# EAGLE board schematic-1 (EAGLE 7.2.0)

Size 160 x 100 mm. Coordinates in mm from the lower left corner, seen from the top.
Outline: 0,0 160,0 160,100 0,100 0,0
Copper layers (1*16): Top 0.035mm / dielectric 1.5mm / Bottom 0.035mm
Design rules "default": minimum track width 10mil, minimum drill 24mil, track to track 8mil, track to pad 8mil, pad to pad 8mil, via to via 8mil, smd to smd 8mil, copper to edge 40mil, drill to drill 8mil, minimum pad ring 10mil, minimum via ring 8mil, stop-mask expansion 4mil, vias tented up to drill 0mil, thermal gap 10mil

## Footprints (pad centres in the part's own frame; a part is rotated, then mirrored left to right if it is on the bottom)
PANASONIC_D = smd 3 x 1.4: + 2.4,0; - -2.4,0
C0805K = smd 1.3 x 1.6: 1 -1,0; 2 1,0
USB-MINIB = smd 0.5 x 2.308: D+ 0,4.064; D- -0.8,4.064; GND 1.6,4.064; ID 0.8,4.064; VBUS -1.6,4.064 | smd 2 x 2.4: GND1 -4.4,-2; GND2 -4.4,3.5; GND3 4.4,3.5; GND4 4.4,-2 | hole 1: -2.2,1; 2.2,1
DO-214AC = smd 1.8 x 2.4: A 2.025,0; C -2.025,0
LQFP100-14MM = smd 0.3 x 1.2: P$1 -6,-7.75; P$2 -5.5,-7.75; P$3 -5,-7.75; P$4 -4.5,-7.75; P$5 -4,-7.75; P$6 -3.5,-7.75; P$7 -3,-7.75; P$8 -2.5,-7.75; P$9 -2,-7.75; P$10 -1.5,-7.75; P$11 -1,-7.75; P$12 -0.5,-7.75; P$13 0,-7.75; P$14 0.5,-7.75; P$15 1,-7.75; P$16 1.5,-7.75; P$17 2,-7.75; P$18 2.5,-7.75; P$19 3,-7.75; P$20 3.5,-7.75; P$21 4,-7.75; P$22 4.5,-7.75; P$23 5,-7.75; P$24 5.5,-7.75; P$25 6,-7.75; P$51 6,7.75; P$52 5.5,7.75; P$53 5,7.75; P$54 4.5,7.75; P$55 4,7.75; P$56 3.5,7.75; P$57 3,7.75; P$58 2.5,7.75; P$59 2,7.75; P$60 1.5,7.75; P$61 1,7.75; P$62 0.5,7.75; P$63 0,7.75; P$64 -0.5,7.75; P$65 -1,7.75; P$66 -1.5,7.75; P$67 -2,7.75; P$68 -2.5,7.75; P$69 -3,7.75; P$70 -3.5,7.75; P$71 -4,7.75; P$72 -4.5,7.75; P$73 -5,7.75; P$74 -5.5,7.75; P$75 -6,7.75 | smd 1.2 x 0.3: P$26 7.75,-6; P$27 7.75,-5.5; P$28 7.75,-5; P$29 7.75,-4.5; P$30 7.75,-4; P$31 7.75,-3.5; P$32 7.75,-3; P$33 7.75,-2.5; P$34 7.75,-2; P$35 7.75,-1.5; P$36 7.75,-1; P$37 7.75,-0.5; P$38 7.75,0; P$39 7.75,0.5; P$40 7.75,1; P$41 7.75,1.5; P$42 7.75,2; P$43 7.75,2.5; P$44 7.75,3; P$45 7.75,3.5; P$46 7.75,4; P$47 7.75,4.5; P$48 7.75,5; P$49 7.75,5.5; P$50 7.75,6; P$76 -7.75,6; P$77 -7.75,5.5; P$78 -7.75,5; P$79 -7.75,4.5; P$80 -7.75,4; P$81 -7.75,3.5; P$82 -7.75,3; P$83 -7.75,2.5; P$84 -7.75,2; P$85 -7.75,1.5; P$86 -7.75,1; P$87 -7.75,0.5; P$88 -7.75,0; P$89 -7.75,-0.5; P$90 -7.75,-1; P$91 -7.75,-1.5; P$92 -7.75,-2; P$93 -7.75,-2.5; P$94 -7.75,-3; P$95 -7.75,-3.5; P$96 -7.75,-4; P$97 -7.75,-4.5; P$98 -7.75,-5; P$99 -7.75,-5.5; P$100 -7.75,-6
SOIC8 = smd 0.6 x 2.2: 1 -1.905,-2.6; 2 -0.635,-2.6; 3 0.635,-2.6; 4 1.905,-2.6; 5 1.905,2.6; 6 0.635,2.6; 7 -0.635,2.6; 8 -1.905,2.6
TO263-5 = smd 1.067 x 2.159: 1 -3.404,-5.791; 2 -1.702,-5.791; 3 0,-5.791; 4 1.702,-5.791; 5 3.404,-5.791 | smd 10.8 x 10.41: 6 0,2.54
2X03 = drill 1.016 octagon: 1 -2.54,-1.27; 2 -2.54,1.27; 3 0,-1.27; 4 0,1.27; 5 2.54,-1.27; 6 2.54,1.27
1X04 = drill 1.016 long: 1 -3.81,0; 2 -1.27,0; 3 1.27,0; 4 3.81,0
2X05 = drill 1.016 octagon: 1 -5.08,-1.27; 2 -5.08,1.27; 3 -2.54,-1.27; 4 -2.54,1.27; 5 0,-1.27; 6 0,1.27; 7 2.54,-1.27; 8 2.54,1.27; 9 5.08,-1.27; 10 5.08,1.27
1X03 = drill 1.016 long: 1 -2.54,0; 2 0,0; 3 2.54,0
1X06 = drill 1.016 long: 1 -6.35,0; 2 -3.81,0; 3 -1.27,0; 4 1.27,0; 5 3.81,0; 6 6.35,0
PINHEAD-4PIN = drill 0.9 pad 1.93: 1 -3.8,0; 2 -1.26,0; 3 1.28,0; 4 3.82,0
PINHEAD-2PIN-HP = drill 1.1 pad 3.5: 1 -2.54,0; 2 2.54,0
0805 = smd 0.8 x 1.2: 1 -0.9,0; 2 0.9,0
CHIP-LED0805 = smd 1.2 x 1.2: A 0,-1.05; C 0,1.05
SOT23 = smd 1 x 1.4: 1 -0.95,-1.1; 2 0.95,-1.1; 3 0,1.1
R0805 = smd 1.3 x 1.5: 1 -0.95,0; 2 0.95,0
TACTILE-PTH = drill 1.016 pad 1.88: 1 -3.251,2.261; 2 3.251,2.261; 3 -3.251,-2.261; 4 3.251,-2.261
SOT669 = smd 0.5 x 1.6: 1 -1.905,-2.8; 2 -0.635,-2.8; 3 0.635,-2.8; 4 1.905,-2.8 | smd 5.2 x 2.7: MB 0,3.3
A4988BREAKOUT = drill 0.9: 1A 8.89,1.27; 1B 11.43,1.27; 2A 6.35,1.27; 2B 3.81,1.27; DIR 16.51,-11.43; EN -1.27,-11.43; GND 16.51,1.27; GND@0 1.27,1.27; MS1 1.27,-11.43; MS2 3.81,-11.43; MS3 6.35,-11.43; RST 8.89,-11.43; SLP 11.43,-11.43; STEP 13.97,-11.43; VDD 13.97,1.27; VMOT -1.27,1.27

## Placement (x,y rotation side)
C1  100uF  [PANASONIC_D]  -81.28,64.77 0 top  (outside the outline)
C2  100uF  [PANASONIC_D]  -90.17,64.77 0 top  (outside the outline)
C3  100uF  [PANASONIC_D]  -99.06,64.77 0 top  (outside the outline)
C4  100uF  [PANASONIC_D]  -17.78,72.39 0 top  (outside the outline)
C5  100uF  [PANASONIC_D]  -26.67,72.39 0 top  (outside the outline)
C6  100uF  [PANASONIC_D]  -35.56,72.39 0 top  (outside the outline)
C9  100nF  [C0805K]  -44.45,104.14 0 top  (outside the outline)
C10  100nF  [C0805K]  -50.8,104.14 0 top  (outside the outline)
C11  4.7uF  [C0805K]  -21.59,110.49 0 top  (outside the outline)
C12  100nF  [C0805K]  -57.15,104.14 0 top  (outside the outline)
C13  100nF  [C0805K]  -63.5,104.14 0 top  (outside the outline)
C14  100nF  [C0805K]  -69.85,104.14 0 top  (outside the outline)
C15  10nF  [C0805K]  -26.67,110.49 0 top  (outside the outline)
C16  1uF  [C0805K]  -62.23,110.49 0 top  (outside the outline)
C17  10uF  [C0805K]  -31.75,110.49 0 top  (outside the outline)
C18  10uF  [C0805K]  -36.83,110.49 0 top  (outside the outline)
C19  10uF  [C0805K]  -41.91,110.49 0 top  (outside the outline)
C20  10uF  [C0805K]  -46.99,110.49 0 top  (outside the outline)
C21  10uF  [C0805K]  -52.07,110.49 0 top  (outside the outline)
C22  100nF  [C0805K]  -76.2,104.14 0 top  (outside the outline)
C23  100nF  [C0805K]  -82.55,104.14 0 top  (outside the outline)
C24  100nF  [C0805K]  -88.9,104.14 0 top  (outside the outline)
C25  100nF  [C0805K]  -95.25,104.14 0 top  (outside the outline)
C26  100nF  [C0805K]  -101.6,104.14 0 top  (outside the outline)
C27  100nF  [C0805K]  -107.95,104.14 0 top  (outside the outline)
C28  100nF  [C0805K]  -16.51,110.49 0 top  (outside the outline)
C29  10nF  [C0805K]  -57.15,110.49 0 top  (outside the outline)
C30  100uF  [PANASONIC_D]  -44.45,72.39 0 top  (outside the outline)
C31  100uF  [PANASONIC_D]  -53.34,72.39 0 top  (outside the outline)
C32  100uF  [PANASONIC_D]  -106,-4 0 top  (outside the outline)
C33  100nF  [C0805K]  -109,-10 0 top  (outside the outline)
CN1  [USB-MINIB]  -100.33,22.86 0 top  (outside the outline)
D1  1N400x-SMD  [DO-214AC]  -102.87,48.26 0 top  (outside the outline)
D2  1N400x-SMD  [DO-214AC]  -22.86,57.15 0 top  (outside the outline)
D3  1N400x-SMD  [DO-214AC]  -35.56,57.15 0 top  (outside the outline)
D4  1N400x-SMD  [DO-214AC]  -48.26,57.15 0 top  (outside the outline)
D5  1N400x-SMD  [DO-214AC]  -60.96,57.15 0 top  (outside the outline)
D6  1N400x-SMD  [DO-214AC]  -73.66,57.15 0 top  (outside the outline)
D7  1N400x-SMD  [DO-214AC]  -86.36,57.15 0 top  (outside the outline)
D8  1N5820  [DO-214AC]  -99.06,57.15 0 top  (outside the outline)
IC1  STM32F10XV  [LQFP100-14MM]  -21.59,8.89 0 top  (outside the outline)
IC2  LT1763CS8-3.3  [SOIC8]  -35.56,3.81 0 top  (outside the outline)
IC3  [TO263-5]  -45.72,7.62 0 top  (outside the outline)
JP1  [2X03]  -44.45,46.99 0 top  (outside the outline)
JP2  [1X04]  -81.28,91.44 0 top  (outside the outline)
JP3  [1X04]  -92.71,91.44 0 top  (outside the outline)
JP4  [2X03]  -53.34,46.99 0 top  (outside the outline)
JP5  [1X04]  -104.14,91.44 0 top  (outside the outline)
JP6  [2X03]  -62.23,46.99 0 top  (outside the outline)
JP7  [1X04]  -19.05,97.79 0 top  (outside the outline)
JP8  [2X03]  -71.12,46.99 0 top  (outside the outline)
JP9  [1X04]  -30.48,97.79 0 top  (outside the outline)
JP10  [2X03]  -80.01,46.99 0 top  (outside the outline)
JP11  [1X04]  -41.91,97.79 0 top  (outside the outline)
JP12  [2X03]  -88.9,46.99 0 top  (outside the outline)
JP13  [2X05]  -33.02,46.99 0 top  (outside the outline)
JP14  [1X03]  -63.5,97.79 0 top  (outside the outline)
JP15  [1X03]  -72.39,97.79 0 top  (outside the outline)
JP16  [1X03]  -81.28,97.79 0 top  (outside the outline)
JP17  [1X03]  -90.17,97.79 0 top  (outside the outline)
JP18  [1X03]  -99.06,97.79 0 top  (outside the outline)
JP19  [1X03]  -17.78,104.14 0 top  (outside the outline)
JP20  [1X03]  -26.67,104.14 0 top  (outside the outline)
JP21  [1X03]  -35.56,104.14 0 top  (outside the outline)
JP22  [1X04]  -53.34,97.79 0 top  (outside the outline)
JP23  [1X04]  -105,-28 0 top  (outside the outline)
JP24  [1X06]  -102,-22 0 top  (outside the outline)
JP25  [1X06]  -102,-34 0 top  (outside the outline)
JP26  [1X03]  -106,-40 0 top  (outside the outline)
JP27  [1X03]  -161,-46 0 top  (outside the outline)
JP28  [1X03]  -161,-52 0 top  (outside the outline)
JP29  [1X03]  -161,-58 0 top  (outside the outline)
JP30  [1X03]  -161,-64 0 top  (outside the outline)
JS1  PINHEAD-4PIN  [PINHEAD-4PIN]  -63.5,72.39 0 top  (outside the outline)
JS2  PINHEAD-4PIN  [PINHEAD-4PIN]  -74.93,72.39 0 top  (outside the outline)
JS3  PINHEAD-4PIN  [PINHEAD-4PIN]  -86.36,72.39 0 top  (outside the outline)
JS4  PINHEAD-4PIN  [PINHEAD-4PIN]  -97.79,72.39 0 top  (outside the outline)
JS5  PINHEAD-4PIN  [PINHEAD-4PIN]  -19.05,80.01 0 top  (outside the outline)
JS6  PINHEAD-4PIN  [PINHEAD-4PIN]  -30.48,80.01 0 top  (outside the outline)
JS7  PINHEAD-2PIN-HP  [PINHEAD-2PIN-HP]  -19.05,39.37 0 top  (outside the outline)
JS8  PINHEAD-2PIN-HP  [PINHEAD-2PIN-HP]  -117,-35 0 top  (outside the outline)
JS9  PINHEAD-2PIN-HP  [PINHEAD-2PIN-HP]  -128,-35 0 top  (outside the outline)
JS10  PINHEAD-2PIN-HP  [PINHEAD-2PIN-HP]  -139,-35 0 top  (outside the outline)
JS11  PINHEAD-2PIN-HP  [PINHEAD-2PIN-HP]  -150,-35 0 top  (outside the outline)
JS12  PINHEAD-2PIN-HP  [PINHEAD-2PIN-HP]  -161,-35 0 top  (outside the outline)
L1  10uH  [0805]  -66.04,110.49 0 top  (outside the outline)
L2  100uH  [0805]  -69.85,110.49 0 top  (outside the outline)
LED1  WHITE  [CHIP-LED0805]  -82.55,36.83 0 top  (outside the outline)
LED2  WHITE  [CHIP-LED0805]  -88.9,36.83 0 top  (outside the outline)
LED3  WHITE  [CHIP-LED0805]  -95.25,36.83 0 top  (outside the outline)
LED4  WHITE  [CHIP-LED0805]  -101.6,36.83 0 top  (outside the outline)
LED5  WHITE  [CHIP-LED0805]  -107.95,36.83 0 top  (outside the outline)
LED6  WHITE  [CHIP-LED0805]  -16.51,46.99 0 top  (outside the outline)
LED7  RED  [CHIP-LED0805]  -60.96,64.77 0 top  (outside the outline)
LED8  RED  [CHIP-LED0805]  -67.31,64.77 0 top  (outside the outline)
LED9  RED  [CHIP-LED0805]  -73.66,64.77 0 top  (outside the outline)
LED10  RED  [CHIP-LED0805]  -22.86,46.99 0 top  (outside the outline)
Q1  BSH105  [SOT23]  -107.95,57.15 0 top  (outside the outline)
Q2  BSH105  [SOT23]  -19.05,64.77 0 top  (outside the outline)
Q3  BSH105  [SOT23]  -27.94,64.77 0 top  (outside the outline)
Q4  BSH105  [SOT23]  -36.83,64.77 0 top  (outside the outline)
Q5  BSH105  [SOT23]  -45.72,64.77 0 top  (outside the outline)
Q6  BSH105  [SOT23]  -54.61,64.77 0 top  (outside the outline)
R1  4k7  [R0805]  -53.34,92.71 0 top  (outside the outline)
R2  4k7  [R0805]  -58.42,92.71 0 top  (outside the outline)
R3  4k7  [R0805]  -63.5,92.71 0 top  (outside the outline)
R4  4k7  [R0805]  -68.58,92.71 0 top  (outside the outline)
R5  4k7  [R0805]  -73.66,92.71 0 top  (outside the outline)
R6  100k  [R0805]  -97.79,78.74 0 top  (outside the outline)
R7  100k  [R0805]  -104.14,78.74 0 top  (outside the outline)
R8  10R  [R0805]  -80.01,86.36 0 top  (outside the outline)
R9  180R  [R0805]  -40.64,78.74 0 top  (outside the outline)
R10  100k  [R0805]  -16.51,86.36 0 top  (outside the outline)
R11  100k  [R0805]  -22.86,86.36 0 top  (outside the outline)
R12  10R  [R0805]  -86.36,86.36 0 top  (outside the outline)
R13  180R  [R0805]  -46.99,78.74 0 top  (outside the outline)
R14  100k  [R0805]  -29.21,86.36 0 top  (outside the outline)
R15  100k  [R0805]  -35.56,86.36 0 top  (outside the outline)
R16  10R  [R0805]  -92.71,86.36 0 top  (outside the outline)
R17  180R  [R0805]  -53.34,78.74 0 top  (outside the outline)
R18  100k  [R0805]  -41.91,86.36 0 top  (outside the outline)
R19  100k  [R0805]  -48.26,86.36 0 top  (outside the outline)
R20  10R  [R0805]  -99.06,86.36 0 top  (outside the outline)
R21  180R  [R0805]  -59.69,78.74 0 top  (outside the outline)
R22  100k  [R0805]  -54.61,86.36 0 top  (outside the outline)
R23  100k  [R0805]  -60.96,86.36 0 top  (outside the outline)
R24  10R  [R0805]  -105.41,86.36 0 top  (outside the outline)
R25  180R  [R0805]  -66.04,78.74 0 top  (outside the outline)
R26  100k  [R0805]  -67.31,86.36 0 top  (outside the outline)
R27  100k  [R0805]  -73.66,86.36 0 top  (outside the outline)
R28  10R  [R0805]  -16.51,92.71 0 top  (outside the outline)
R29  180R  [R0805]  -72.39,78.74 0 top  (outside the outline)
R30  22R  [R0805]  -22.86,92.71 0 top  (outside the outline)
R31  22R  [R0805]  -29.21,92.71 0 top  (outside the outline)
R32  1k  [R0805]  -35.56,92.71 0 top  (outside the outline)
R33  180R  [R0805]  -78.74,78.74 0 top  (outside the outline)
R34  180R  [R0805]  -85.09,78.74 0 top  (outside the outline)
R35  100R  [R0805]  -91.44,78.74 0 top  (outside the outline)
R36  10K  [R0805]  -41.91,92.71 0 top  (outside the outline)
R37  3K3  [R0805]  -48.26,92.71 0 top  (outside the outline)
S2  SWITCH-MOMENTARY-2PTH  [TACTILE-PTH]  -36.83,36.83 0 top  (outside the outline)
T1  PSMN7R0-30YL  [SOT669]  -44.45,36.83 0 top  (outside the outline)
T2  PSMN7R0-30YL  [SOT669]  -50.8,36.83 0 top  (outside the outline)
T3  PSMN7R0-30YL  [SOT669]  -57.15,36.83 0 top  (outside the outline)
T4  PSMN7R0-30YL  [SOT669]  -63.5,36.83 0 top  (outside the outline)
T5  PSMN7R0-30YL  [SOT669]  -69.85,36.83 0 top  (outside the outline)
T6  PSMN7R0-30YL  [SOT669]  -76.2,36.83 0 top  (outside the outline)
U$1  POLOLU_A4983CARRIER  [A4988BREAKOUT]  -71.12,12.7 0 top  (outside the outline)
U$2  POLOLU_A4983CARRIER  [A4988BREAKOUT]  -91.44,12.7 0 top  (outside the outline)
U$3  POLOLU_A4983CARRIER  [A4988BREAKOUT]  -30.48,30.48 0 top  (outside the outline)
U$4  POLOLU_A4983CARRIER  [A4988BREAKOUT]  -50.8,30.48 0 top  (outside the outline)
U$5  POLOLU_A4983CARRIER  [A4988BREAKOUT]  -71.12,30.48 0 top  (outside the outline)
U$6  POLOLU_A4983CARRIER  [A4988BREAKOUT]  -91.44,30.48 0 top  (outside the outline)

## Library data of the parts
C1-C6 C30-C32 = SparkFun-Capacitors
C9-C29 C33 R1-R37 = rcl
CN1 LED1-LED10 Q1-Q6 = adafruit
D1-D8 = diode
IC1 = STM32
IC2 = linear-technology; MPN: LT1763CS8-3.3; OC_FARNELL: 1273617; OC_NEWARK: 57M6055
IC3 = linear
JP1-JP30 = pinhead
JS1-JS12 T1-T6 = STamps
L1 L2 = SparkFun-Passives
S2 = SparkFun-Electromechanical; PROD_ID: SWCH-08441
U$1-U$6 = RepRapjr

## Nets
3.3V: C9.1 C10.1 C11.1 C12.1 C13.1 C14.1 C30.+ IC1.P$11 IC1.P$28 IC1.P$50 IC1.P$75 IC1.P$100 IC2.1 JP14.1 JP15.1 JP16.1 JP17.1 JP18.1 JP19.1 JP20.1 JP21.1 JP23.4 JP24.6 JP26.1 L1.1 R1.2 R2.2 R3.2 R4.2 R5.2 R6.2 R10.2 R14.2 R18.2 R22.2 R26.2 R35.1 U$1.VDD U$2.VDD U$3.VDD U$4.VDD U$5.VDD U$6.VDD
5V: C32.+ D7.C IC2.5 IC2.8 JP1.2 JP1.4 JP1.6 JP4.2 JP4.4 JP4.6 JP6.2 JP6.4 JP6.6 JP8.2 JP8.4 JP8.6 JP10.2 JP10.4 JP10.6 JP12.2 JP12.4 JP12.6 JP26.3 L2.2 R7.2 R9.1 R11.2 R13.1 R15.2 R17.1 R19.2 R21.1 R23.2 R25.1 R27.2 R29.1 R34.1 R36.2
12V: C1.+ C2.+ C3.+ C4.+ C5.+ C6.+ C31.+ C33.1 D1.C D2.C D3.C D4.C D5.C D6.C IC3.1 JS7.1 JS8.1 JS9.1 JS10.1 JS11.1 JS12.1 R32.1 U$1.VMOT U$2.VMOT U$3.VMOT U$4.VMOT U$5.VMOT U$6.VMOT
BED_LED: LED1.C R8.2 T1.4
BL_RX: IC1.P$79 JP25.3
BL_TX: IC1.P$78 JP25.2
BOOT0: IC1.P$94 JP15.2
BOOT1: IC1.P$37 JP21.2
E0: IC1.P$25 Q2.1 R10.1
E0_DIR: IC1.P$56 U$3.DIR
E0_EN: IC1.P$46 U$3.EN
E0_LED: LED2.C R12.2 T2.4
E0_OUTPUT: D1.A JS8.2 T2.MB
E0_STEP: IC1.P$55 U$3.STEP
E1: IC1.P$35 Q3.1 R14.1
E1_DIR: IC1.P$45 U$1.DIR
E1_EN: IC1.P$43 U$1.EN
E1_LED: LED3.C R16.2 T3.4
E1_OUTPUT: D3.A JS9.2 T3.MB
E1_STEP: IC1.P$44 U$1.STEP
E2: IC1.P$36 Q4.1 R18.1
E2_DIR: IC1.P$42 U$2.DIR
E2_EN: IC1.P$40 U$2.EN
E2_LED: LED4.C R20.2 T4.4
E2_OUTPUT: D4.A JS10.2 T4.MB
E2_STEP: IC1.P$41 U$2.STEP
EXTRA0: IC1.P$63 Q5.1 R22.1
EXTRA0_LED: LED5.C R24.2 T5.4
EXTRA0_OUTPUT: D5.A JS11.2 T5.MB
EXTRA1: IC1.P$64 Q6.1 R26.1
EXTRA1_LED: LED6.C R28.2 T6.4
EXTRA1_OUTPUT: D6.A JS12.2 T6.MB
GND: C1.- C2.- C3.- C4.- C5.- C6.- C9.2 C10.2 C11.2 C12.2 C13.2 C14.2 C15.1 C16.1 C17.2 C18.2 C19.2 C20.2 C21.2 C22.1 C23.1 C24.1 C25.1 C26.1 C27.1 C28.1 C30.- C31.- C32.- C33.2 CN1.GND D8.A IC1.P$10 IC1.P$19 IC1.P$20 IC1.P$27 IC1.P$49 IC1.P$74 IC1.P$99 IC2.3 IC2.6 IC2.7 IC3.3 IC3.5 IC3.6 JP13.2 JP13.4 JP13.6 JP13.8 JP13.10 JP14.2 JP15.3 JP16.2 JP17.2 JP18.2 JP19.2 JP20.2 JP21.3 JP23.1 JP24.4 JP25.4 JP27.1 JP28.1 JP29.1 JP30.1 LED7.C LED8.C LED9.C LED10.C Q1.2 Q2.2 Q3.2 Q4.2 Q5.2 Q6.2 R37.1 S2.3 T1.1 T1.2 T1.3 T2.1 T2.2 T2.3 T3.1 T3.2 T3.3 T4.1 T4.2 T4.3 T5.1 T5.2 T5.3 T6.1 T6.2 T6.3 U$1.GND U$1.GND@0 U$2.GND U$2.GND@0 U$3.GND U$3.GND@0 U$4.GND U$4.GND@0 U$5.GND U$5.GND@0 U$6.GND U$6.GND@0
HEATBED: IC1.P$24 Q1.1 R6.1
HEATBED_OUTPUT: D2.A JS7.2 T1.MB
N$1: JP1.1 U$2.MS1
N$2: JP1.3 U$2.MS2
N$3: JP1.5 U$2.MS3
N$4: U$2.RST U$2.SLP
N$5: JP2.1 JS6.4 U$2.1B
N$6: JP2.2 JS6.3 U$2.1A
N$7: JP2.3 JS6.2 U$2.2A
N$8: JP2.4 JS6.1 U$2.2B
N$9: JP4.1 U$1.MS1
N$10: JP4.3 U$1.MS2
N$11: JP4.5 U$1.MS3
N$12: U$1.RST U$1.SLP
N$13: JP5.1 JS5.4 U$1.1B
N$14: JP5.2 JS5.3 U$1.1A
N$15: JP5.3 JS5.2 U$1.2A
N$16: JP5.4 JS5.1 U$1.2B
N$17: JP6.1 U$3.MS1
N$18: JP6.3 U$3.MS2
N$19: JP6.5 U$3.MS3
N$20: U$3.RST U$3.SLP
N$21: JP7.1 JS4.4 U$3.1B
N$22: JP7.2 JS4.3 U$3.1A
N$23: JP7.3 JS4.2 U$3.2A
N$24: JP7.4 JS4.1 U$3.2B
N$25: JP8.1 U$4.MS1
N$26: JP8.3 U$4.MS2
N$27: JP8.5 U$4.MS3
N$28: U$4.RST U$4.SLP
N$29: JP9.1 JS3.4 U$4.1B
N$30: JP9.2 JS3.3 U$4.1A
N$31: JP9.3 JS3.2 U$4.2A
N$32: JP9.4 JS3.1 U$4.2B
N$33: JP10.1 U$5.MS1
N$34: JP10.3 U$5.MS2
N$35: JP10.5 U$5.MS3
N$36: U$5.RST U$5.SLP
N$37: JP11.1 JS2.4 U$5.1B
N$38: JP11.2 JS2.3 U$5.1A
N$39: JP11.3 JS2.2 U$5.2A
N$40: JP11.4 JS2.1 U$5.2B
N$41: JP12.1 U$6.MS1
N$42: JP12.3 U$6.MS2
N$43: JP12.5 U$6.MS3
N$44: U$6.RST U$6.SLP
N$45: JP3.1 JP22.1 JS1.4 U$6.1B
N$46: JP3.2 JP22.2 JS1.3 U$6.1A
N$47: JP3.3 JP22.3 JS1.2 U$6.2A
N$48: JP3.4 JP22.4 JS1.1 U$6.2B
N$49: LED1.A R9.2
N$50: C15.2 C16.2 IC1.P$21 IC1.P$22 L1.2
N$51: C29.1 IC2.4
N$52: IC3.4 R36.1 R37.2
N$53: CN1.D- R31.1
N$54: CN1.D+ R30.1
N$55: C29.2 IC2.2
N$56: LED7.A R32.2
N$57: LED8.A R33.2
N$58: Q1.3 R7.1 R8.1
N$59: D8.C IC3.2 L2.1
N$60: LED9.A R34.2
N$61: LED10.A R35.2
N$62: JP25.5 JP26.2
N$63: Q4.3 R19.1 R20.1
N$65: Q5.3 R23.1 R24.1
N$66: LED6.A R29.2
N$67: LED5.A R25.2
N$68: Q6.3 R27.1 R28.1
N$69: Q3.3 R15.1 R16.1
N$70: Q2.3 R11.1 R12.1
N$71: LED4.A R21.2
N$72: LED3.A R17.2
N$73: LED2.A R13.2
N$74: JP27.2 JP29.2 JP30.2
NRST: C28.2 IC1.P$14 JP24.2 S2.1
SERVO0: IC1.P$85 JP27.3
SERVO1: IC1.P$86 JP28.3
SERVO2: IC1.P$87 JP29.3
SERVO3: IC1.P$88 JP30.3
SWCLK: IC1.P$76 JP24.5
SWDIO: IC1.P$72 JP24.3
SWO: IC1.P$89 JP24.1
T0: C21.1 IC1.P$15 JP13.1 R5.1
T1: C20.1 IC1.P$16 JP13.3 R4.1
T2: C17.1 IC1.P$17 JP13.5 R2.1
T3: C18.1 IC1.P$18 JP13.7 R1.1
T4: C19.1 IC1.P$23 JP13.9 R3.1
USART1_RX: IC1.P$69 JP23.2
USART1_TX: IC1.P$68 JP23.3
USBDM: IC1.P$70 R31.2
USBDP: IC1.P$71 R30.2
VCC_1: CN1.VBUS D7.A R33.1
X-MAX: C23.2 IC1.P$1 JP16.3
X-MIN: C22.2 IC1.P$98 JP14.3
X_DIR: IC1.P$62 U$5.DIR
X_EN: IC1.P$60 U$5.EN
X_STEP: IC1.P$61 U$5.STEP
Y-MAX: C25.2 IC1.P$3 JP18.3
Y-MIN: C24.2 IC1.P$2 JP17.3
Y_DIR: IC1.P$59 U$4.DIR
Y_EN: IC1.P$57 U$4.EN
Y_STEP: IC1.P$58 U$4.STEP
Z-MAX: C27.2 IC1.P$5 JP20.3
Z-MIN: C26.2 IC1.P$4 JP19.3
Z_DIR: IC1.P$84 U$6.DIR
Z_EN: IC1.P$80 U$6.EN
Z_STEP: IC1.P$83 U$6.STEP

## Tracks (layer width: path | path; a pad name or v marks a point on that pad's centre or on a via)
3.3V  (42 unrouted)
5V  (37 unrouted)
12V  (27 unrouted)
BED_LED  (2 unrouted)
BL_RX  (1 unrouted)
BL_TX  (1 unrouted)
BOOT0  (1 unrouted)
BOOT1  (1 unrouted)
E0  (2 unrouted)
E0_DIR  (1 unrouted)
E0_EN  (1 unrouted)
E0_LED  (2 unrouted)
E0_OUTPUT  (2 unrouted)
E0_STEP  (1 unrouted)
E1  (2 unrouted)
E1_DIR  (1 unrouted)
E1_EN  (1 unrouted)
E1_LED  (2 unrouted)
E1_OUTPUT  (2 unrouted)
E1_STEP  (1 unrouted)
E2  (2 unrouted)
E2_DIR  (1 unrouted)
E2_EN  (1 unrouted)
E2_LED  (2 unrouted)
E2_OUTPUT  (2 unrouted)
E2_STEP  (1 unrouted)
EXTRA0  (2 unrouted)
EXTRA0_LED  (2 unrouted)
EXTRA0_OUTPUT  (2 unrouted)
EXTRA1  (2 unrouted)
EXTRA1_LED  (2 unrouted)
EXTRA1_OUTPUT  (2 unrouted)
GND  (106 unrouted)
HEATBED  (2 unrouted)
HEATBED_OUTPUT  (2 unrouted)
N$1  (1 unrouted)
N$2  (1 unrouted)
N$3  (1 unrouted)
N$4  (1 unrouted)
N$5  (2 unrouted)
N$6  (2 unrouted)
N$7  (2 unrouted)
N$8  (2 unrouted)
N$9  (1 unrouted)
N$10  (1 unrouted)
N$11  (1 unrouted)
N$12  (1 unrouted)
N$13  (2 unrouted)
N$14  (2 unrouted)
N$15  (2 unrouted)
N$16  (2 unrouted)
N$17  (1 unrouted)
N$18  (1 unrouted)
N$19  (1 unrouted)
N$20  (1 unrouted)
N$21  (2 unrouted)
N$22  (2 unrouted)
N$23  (2 unrouted)
N$24  (2 unrouted)
N$25  (1 unrouted)
N$26  (1 unrouted)
N$27  (1 unrouted)
N$28  (1 unrouted)
N$29  (2 unrouted)
N$30  (2 unrouted)
N$31  (2 unrouted)
N$32  (2 unrouted)
N$33  (1 unrouted)
N$34  (1 unrouted)
N$35  (1 unrouted)
N$36  (1 unrouted)
N$37  (2 unrouted)
N$38  (2 unrouted)
N$39  (2 unrouted)
N$40  (2 unrouted)
N$41  (1 unrouted)
N$42  (1 unrouted)
N$43  (1 unrouted)
N$44  (1 unrouted)
N$45  (3 unrouted)
N$46  (3 unrouted)
N$47  (3 unrouted)
N$48  (3 unrouted)
N$49  (1 unrouted)
N$50  (4 unrouted)
N$51  (1 unrouted)
N$52  (2 unrouted)
N$53  (1 unrouted)
N$54  (1 unrouted)
N$55  (1 unrouted)
N$56  (1 unrouted)
N$57  (1 unrouted)
N$58  (2 unrouted)
N$59  (2 unrouted)
N$60  (1 unrouted)
N$61  (1 unrouted)
N$62  (1 unrouted)
N$63  (2 unrouted)
N$65  (2 unrouted)
N$66  (1 unrouted)
N$67  (1 unrouted)
N$68  (2 unrouted)
N$69  (2 unrouted)
N$70  (2 unrouted)
N$71  (1 unrouted)
N$72  (1 unrouted)
N$73  (1 unrouted)
N$74  (2 unrouted)
NRST  (3 unrouted)
SERVO0  (1 unrouted)
SERVO1  (1 unrouted)
SERVO2  (1 unrouted)
SERVO3  (1 unrouted)
SWCLK  (1 unrouted)
SWDIO  (1 unrouted)
SWO  (1 unrouted)
T0  (3 unrouted)
T1  (3 unrouted)
T2  (3 unrouted)
T3  (3 unrouted)
T4  (3 unrouted)
USART1_RX  (1 unrouted)
USART1_TX  (1 unrouted)
USBDM  (1 unrouted)
USBDP  (1 unrouted)
VCC_1  (2 unrouted)
X-MAX  (2 unrouted)
X-MIN  (2 unrouted)
X_DIR  (1 unrouted)
X_EN  (1 unrouted)
X_STEP  (1 unrouted)
Y-MAX  (2 unrouted)
Y-MIN  (2 unrouted)
Y_DIR  (1 unrouted)
Y_EN  (1 unrouted)
Y_STEP  (1 unrouted)
Z-MAX  (2 unrouted)
Z-MIN  (2 unrouted)
Z_DIR  (1 unrouted)
Z_EN  (1 unrouted)
Z_STEP  (1 unrouted)